# EAGLE board ir-sensor-breakout-mk-2.2 (EAGLE 6.5.0)
VERSION: v2.2
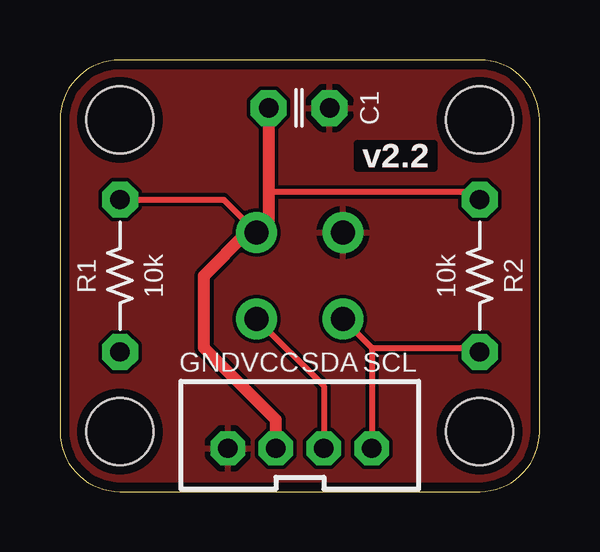
[diagram p0: board, top side]
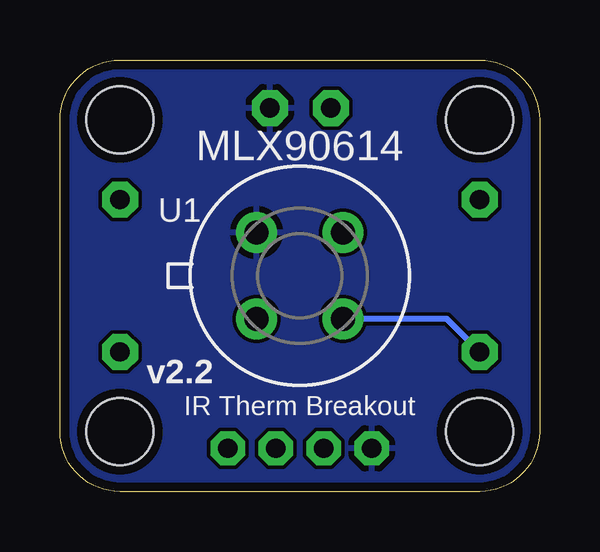
[diagram p1: board, bottom side, seen from below]

Size 20 x 18 mm. Coordinates in mm from the lower left corner, seen from the top.
Outline: 0,15.5 0,2.5 arc90 2.5,0 17.5,0 arc90 20,2.5 20,15.5 arc90 17.5,18 2.5,18 arc90 0,15.5
Copper layers (1*16): Top 0.0356mm / dielectric 1.5011mm / Bottom 0.0356mm
Design rules "LaenPCBOrder_2": minimum track width 6mil, minimum drill 13mil, track to track 6mil, track to pad 6mil, pad to pad 6mil, via to via 6mil, smd to smd 6mil, copper to edge 15mil, drill to drill 6mil, minimum pad ring 7mil, minimum via ring 7mil, stop-mask expansion 3mil, vias tented up to drill 20mil, thermal gap 10mil
Holes 2.8 mm at 2.5,15.5 17.5,15.5 17.5,2.5 2.5,2.5

## Footprints (pad centres in the part's own frame; a part is rotated, then mirrored left to right if it is on the bottom)
C025-024X044 = drill 0.813 pad 1.5 octagon: 1 -1.27,0; 2 1.27,0
JST-4-PH-VERT-PTH = drill 0.8 pad 1.422 octagon: 1 0,0; 2 2,0; 3 4,0; 4 6,0
RESISTOR-AXIAL-PTH-6.35MM = drill 0.8 pad 1.5 octagon: P$1 -3.175,0; P$2 3.175,0
TO-39-4 = drill 1 pad 1.7: 1 -1.8,1.8; 2 -1.8,-1.8; 3 1.8,-1.8; 4 1.8,1.8

## Placement (x,y rotation side)
C1  100nF  [C025-024X044]  9.97,16 0 top
FRAME1  FRAME-LETTERNO_PACKAGE  [DUMMY]  0,0 0 top
I2C  M04JST-PTH-VERT  [JST-4-PH-VERT-PTH]  7,1.8 0 top
R1  10k  [RESISTOR-AXIAL-PTH-6.35MM]  2.5,9 90 top
R2  10k  [RESISTOR-AXIAL-PTH-6.35MM]  17.5,9 90 top
U1  MLX90614-PTH  [TO-39-4]  10,9 90 bottom

## Library data of the parts
C1 I2C R1 R2 U1 = A_butts
FRAME1 = A_butts; DESIGNER: sean@yak.net; VERSION: v2.2-PTH

## Nets
GND: C1.2 I2C.1 U1.4
SCL: I2C.4 R2.P$1 U1.1
SDA: I2C.3 R1.P$1 U1.2
VCC: C1.1 I2C.2 R1.P$2 R2.P$2 U1.3

## Tracks (layer width: path | path; a pad name or v marks a point on that pad's centre or on a via)
GND
  pour Top: 0,15.5 0,2.5 arc90 2.5,0 17.5,0 arc90 20,2.5 20,15.5 arc90 17.5,18 2.5,18 arc90
  pour Bottom: 17.5,0 2.5,0 arc-90 0,2.5 0,15.5 arc-90 2.5,18 17.5,18 arc-90 20,15.5 20,2.5 arc-90
SCL
  Top 0.25: U1.1 13,6 | 13,6 I2C.4 | 13,6 17.32,6 R2.P$1
SDA
  Top 0.25: U1.2 11,4.4 I2C.3
  Bottom 0.25: R1.P$1 3.88,7.2 U1.2
VCC
  Top 0.25: R1.P$2 6.83,12.18 U1.3 | R2.P$2 17.18,12.5 8.7,12.5
  Top 0.5: I2C.2 9,3 6,6 6,9 7.8,10.8 U1.3 8.7,11.3 8.7,12.5 C1.1

## Text on the board
tPlace: GND | VCC | SDA | SCL
bPlace: MLX90614 | IR Therm Breakout